# Altium PCB PCB1.PcbDoc
Units mil, origin at the board's own origin, x right, y up, seen from the top; angles counter-clockwise.
Board outline 1355 x 1300 mil, 2 copper layers (Top Layer, Bottom Layer); 3 components, 5 nets, 25 pads, 58 vias.
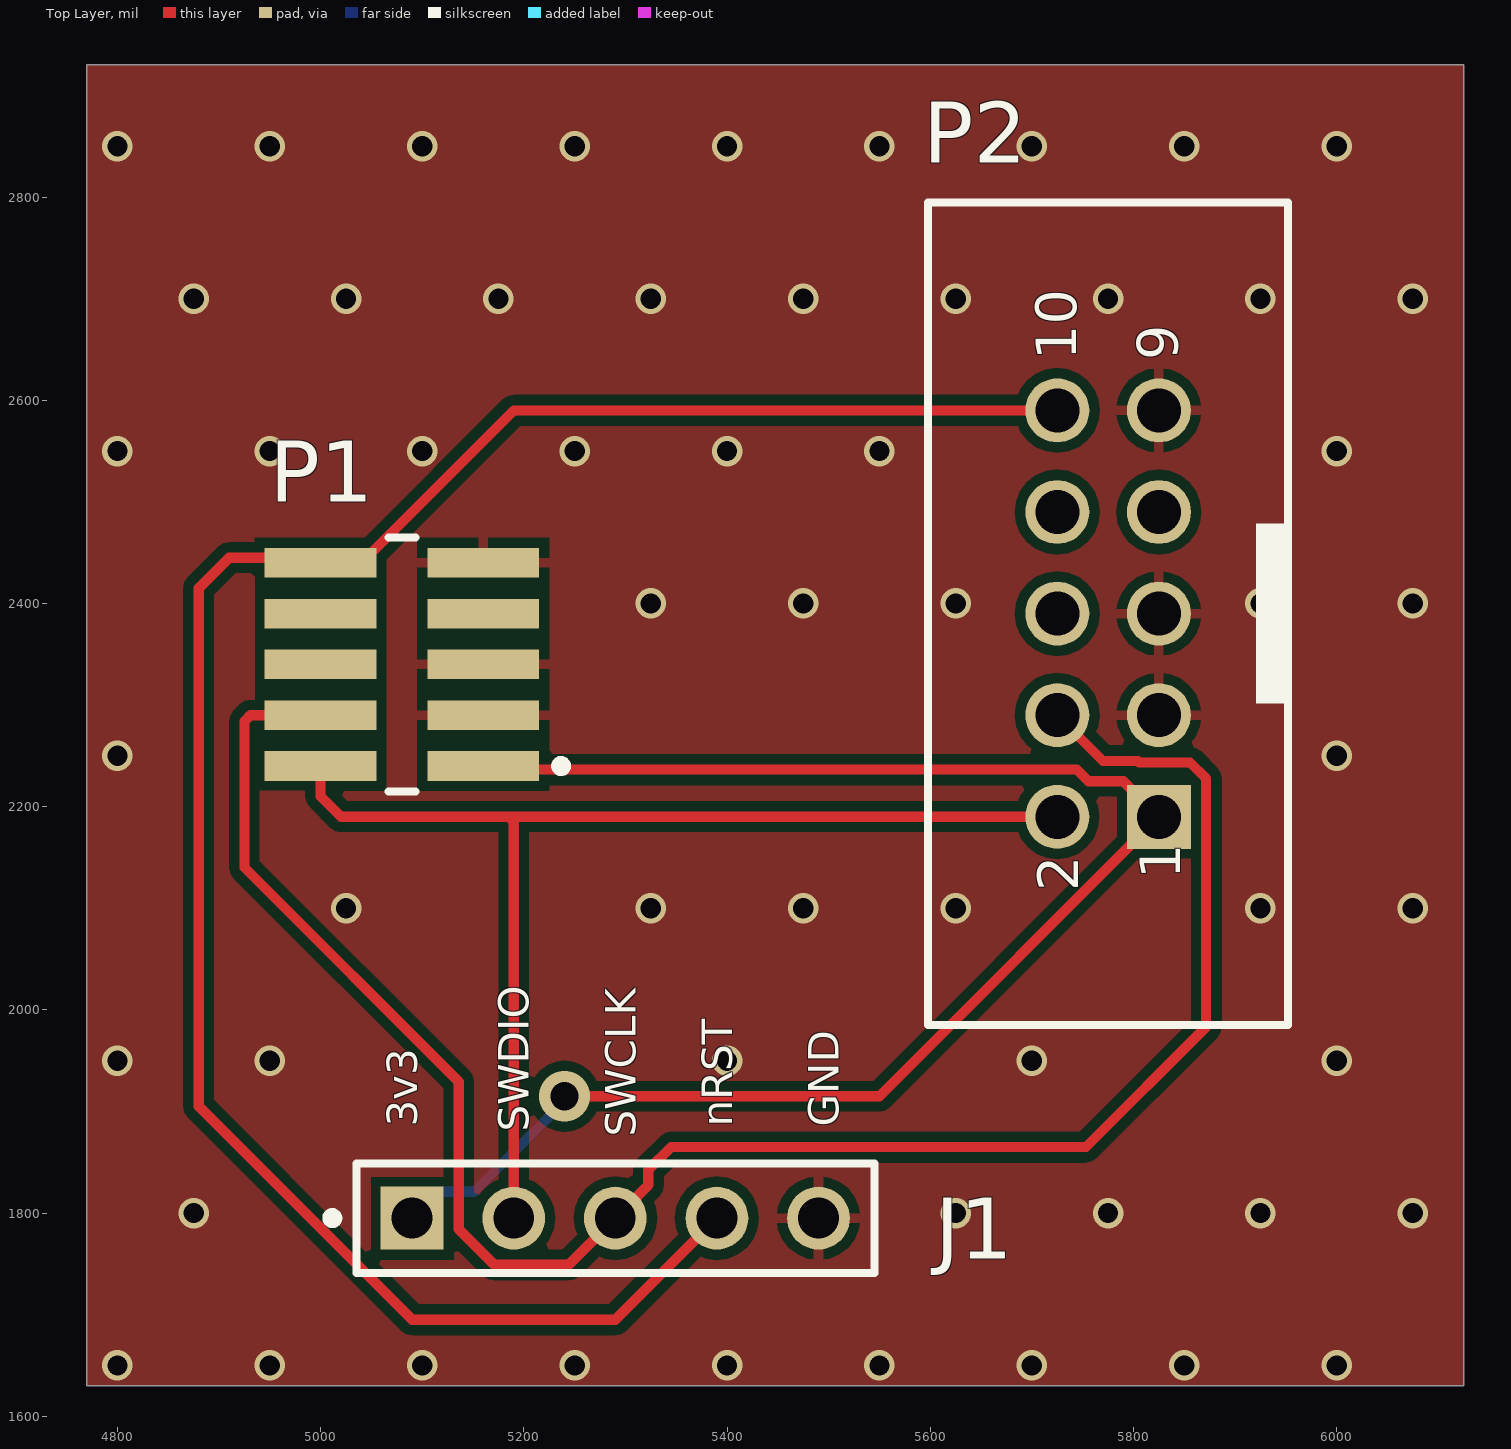
[diagram p0: Top Layer view]
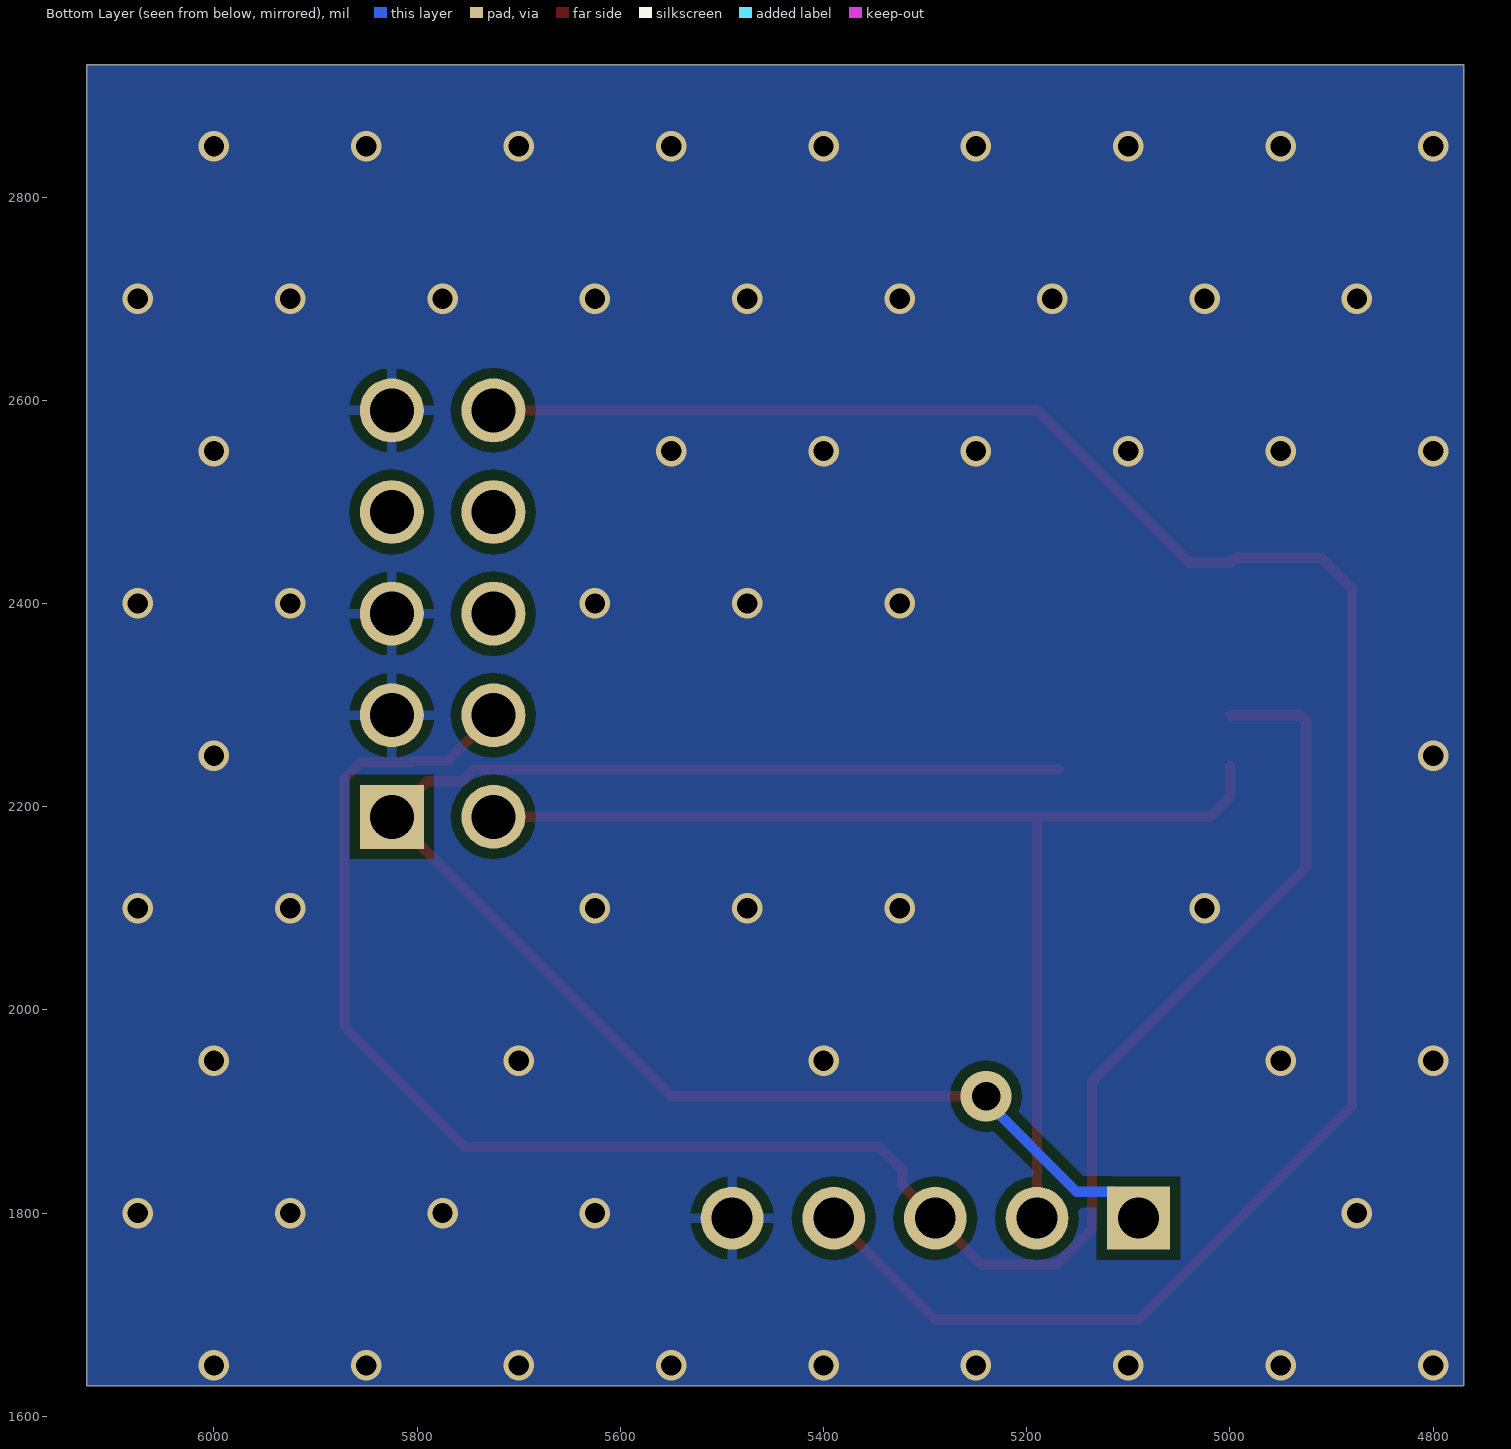
[diagram p1: Bottom Layer view, seen from below]
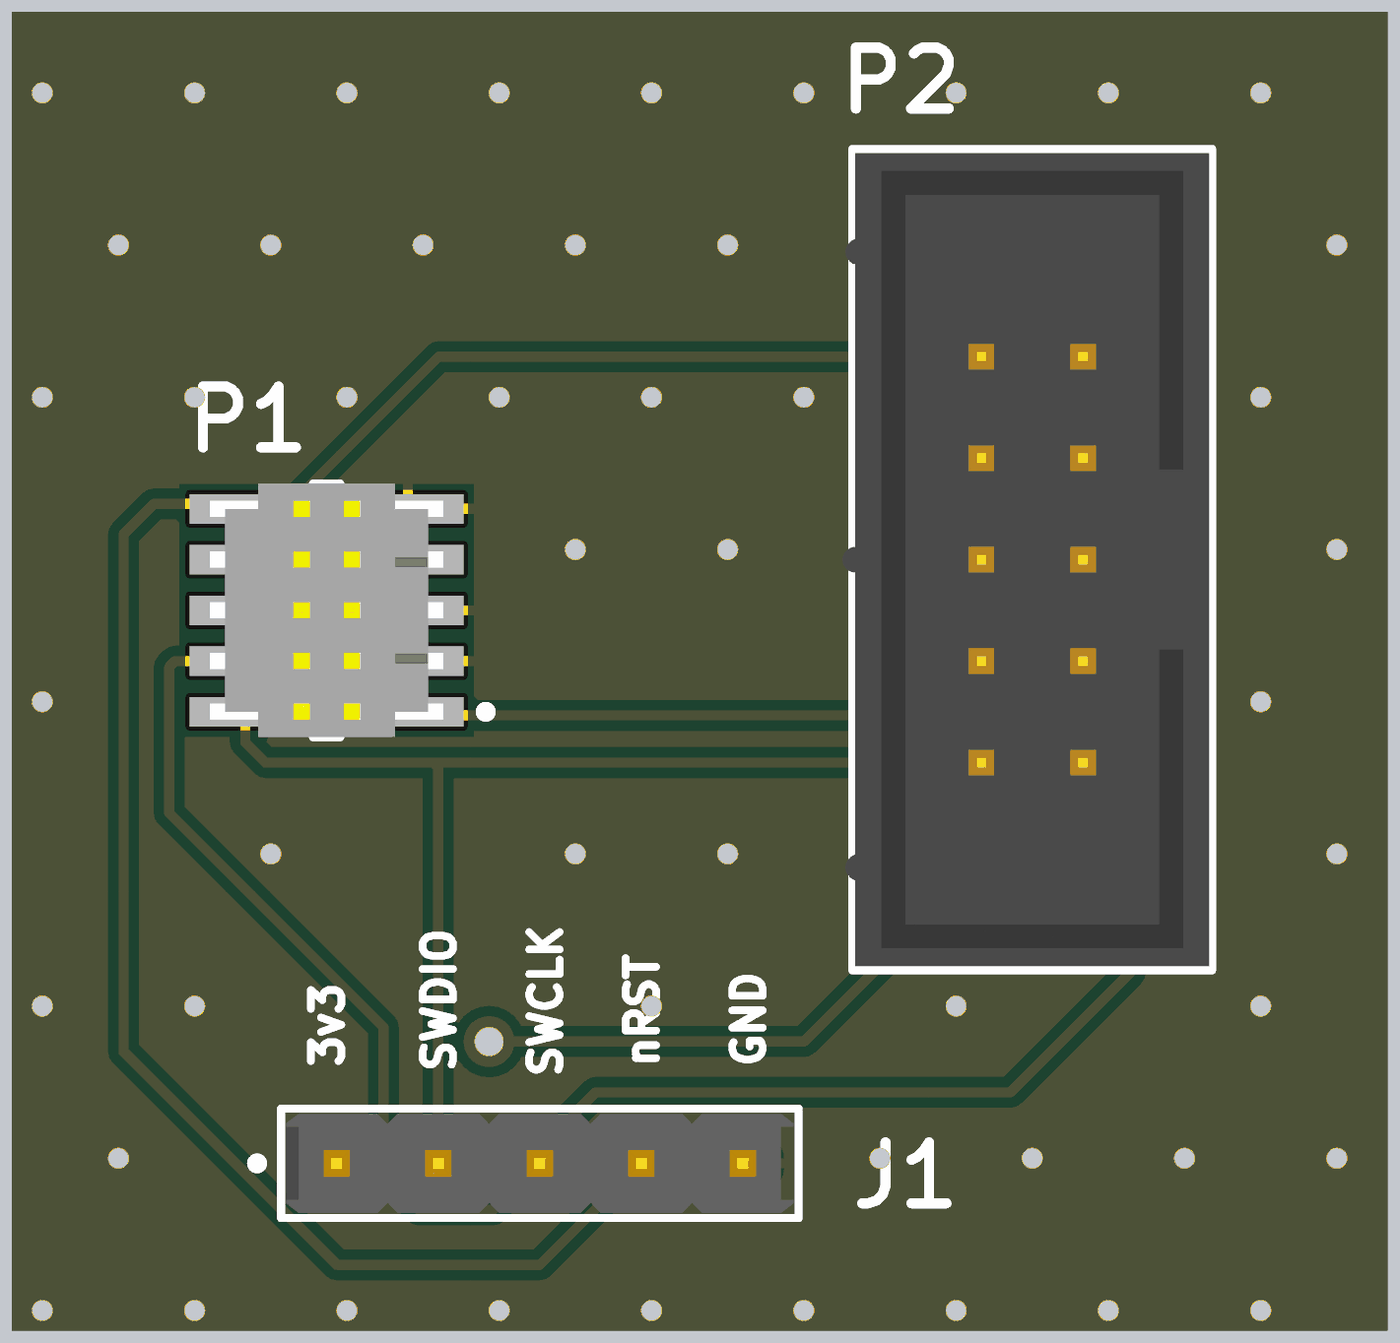
[diagram p2: 3D render of the assembled board from above, using the file's embedded part models]

## Layer stack, top to bottom
Top Solder: solder mask 0.4, Solder Resist, Dk 3.5
Top Layer: signal copper 1.4
Dielectric 1: dielectric 12.6, FR-4, Dk 4.8
Bottom Layer: signal copper 1.4
Bottom Solder: solder mask 0.4, Solder Resist, Dk 3.5

## Board outline
4770,1630 4770,2930 6125,2930 6125,1630

## Design rules (kind name [scope] priority, off if disabled: settings)
Clearance [All] p1: gap=10 ignorepadtopadclearanceinfootprint=FALSE except(0: Arc-Hole Track-Hole SMDPad-Hole THPad-Hole Via-Hole Fill-Hole Poly-Hole Region-Hole Text-Hole)
PlaneConnect [All] p1: pad.planeconnectstyle=Relief pad.reliefexpansion=20 pad.reliefentries=4 pad.reliefconductorwidth=10 pad.reliefairgap=10 via.planeconnectstyle=Direct via.reliefexpansion=20 via.reliefentries=4 via.reliefconductorwidth=10 via.reliefairgap=10
PolygonConnect [All] p1: thpad.connectstyle=Relief thpad.reliefconductorwidth=10 thpad.reliefentries=4 thpad.polygonreliefangle="90 Angle" thpad.airgapwidth=10 smdpad.connectstyle=Relief smdpad.reliefconductorwidth=10 smdpad.reliefentries=4 smdpad.polygonreliefangle="90 Angle" smdpad.airgapwidth=10 via.connectstyle=Direct via.reliefconductorwidth=10 via.reliefentries=4 via.polygonreliefangle="90 Angle" via.airgapwidth=10
RoutingVias [All] p1: holewidth=28 width=50 viastyle="Through Hole" minholewidth=28 minwidth=50 maxholewidth=28 maxwidth=50
SolderMaskExpansion SolderMaskExpansion_1 [IsVia] p1: expansion=4 istentingtop=TRUE
SolderMaskExpansion [All] p2: expansion=4 istentingtop=FALSE
Width [All] p1: maxlimit=10 minlimit=10 preferedwidth=10
29 further rules are at their usual default settings.

## Components (designator, comment, footprint, x,y, rotation, side; value= is the part's Value field where it differs from the comment)
J1 "22-28-4057" FP-22-28-4057-MFG 5290,1795 r0 top
P1 "FTSH-105-01-F-DV-K" SMTC-FTSH-105-01-L-DV-K_V 5080,2340 r90 top
P2 "61201021621" 61201021621 5775,2390 r90 top

## Footprints (in the part's own frame and the unit in brackets; to place one, negate y for a bottom-side part, rotate by r counter-clockwise, add the part's x,y. Pads: shape width x height; smd on the part's side, far side on the other; paste and mask are expansions set on the pad)
61201021621 [mm] "10 pins, straight, gold plating"
  rect 1.6x1.6 hole 1.1: 1(-5.08,-1.27)
  round 1.6 hole 1.1: 2(-5.08,1.27) 3(-2.54,-1.27) 4(-2.54,1.27) 5(0,-1.27) 6(0,1.27) 7(2.54,-1.27) 8(2.54,1.27) 9(5.08,-1.27) 10(5.08,1.27)
  silkscreen extent -10.28,-4.5 10.28,4.5, body extent -10.18,-4.42 10.18,4.75, height 9.13
FP-22-28-4057-MFG [mm]
  rect 1.57x1.57 hole 1.02 paste-1000 mask+0: 1(-5.08,0)
  round 1.57 hole 1.02 paste-1000 mask+0: 2(-2.54,0) 3(0,0) 4(2.54,0) 5(5.08,0)
  silkscreen extent -7.2,-1.37 6.48,1.37, body extent -6.58,-1.47 6.58,1.47, height 0.25
SMTC-FTSH-105-01-L-DV-K_V [mm] "CONN, 10-Leads, Body 6.35x3.43mm, Pitch 1.27mm"
  rect 0.74x2.79 smd: 1(-2.54,-2.035) 2(-2.54,2.035) 3(-1.27,-2.035) 4(-1.27,2.035) 5(0,-2.035) 6(0,2.035) 7(1.27,-2.035) 8(1.27,2.035) 9(2.54,-2.035) 10(2.54,2.035)
  silkscreen extent -3.17,-4.11 3.17,0.34, body extent -3.17,-2.92 3.18,2.92, height 6.12

## Part data
J1: library part CMP-04776-001007-1, "KK 100 HDR ASSY BKWY 05 CKT 30 S", Color=Black, Contact Resistance=20mR, Current Rating=4A, Max Operating Temperature=75°C, Max Voltage Rating (DC)=250.25kV, Min Operating Temperature=0°C, Package Quantity=1, Voltage Rating=250V, Connector Type="Male Pin", Contact Material=Brass, Contact Mating Length=0.32inch, Contact Plating=Gold, Contact Type="Male Pin", Gender=Male, Glow Wire Compliant=Non-compliant, Housing Color=Black, Housing Material=Thermoplastic, Lead Free="Lead Free", Mount="Through Hole", Number of Circuits=5, Number of Contacts=5, Number of Positions=5, Number of Rows=1, Orientation=Straight, Packaging=Bulk, Pitch=2.54mm, RoHS Compliant=Yes, Series=42375, Termination=Solder
P1: library part CMP-2000-05352-1, "Male Header, Pitch 1.27 mm, 2 x 5 Position, Height 6.12 mm, RoHS, Tube", Color=Black, Manufacturer=Samtec, Package Description="Male Header, Pitch 1.27 mm, 2 x 5 Position, Height 5.97 mm, Tail Length 4.32 mm", Package Reference=FTSH-105-01-L-DV-K, Category=Connectors,Interconnects, Connector Type=Header,Shrouded, Contact Finish=Gold, Contact Finish Thickness=3µin(0.08µm), Contact Mating Length="0.120\"(3.05mm)", Contact Type=MalePin, Datasheet URL=http://suddendocs.samtec.com/prints/ftsh-1xx-xx-xxx-dv-xxx-mkt.pdf, Datasheet Version="Rev. ET, 10/1995", Family=RectangularConnectors-Headers,MalePins, Fastening Type=-, Features=-, Manufacturer URL=http://www.samtec.com/, Mounting Type=SurfaceMount, Number of Positions=10, Number of Positions Loaded=All, Number of Rows=2, Package URL=http://suddendocs.samtec.com/prints/ftsh-1xx-xx-xxx-dv-xxx-footprint.pdf, Packaging=Tube, Pitch="0.050\"(1.27mm)", Row Spacing="0.050\"(1.27mm)", Series=FTSH, Termination=Solder
P2: library part CMP-1502-00007-1, "Male Box Header WR-BHD, THT, Vertical, pitch 2.54 mm, 10 pins", Contact Resistance=20mOhm, Manufacturer="Wurth Elektronik", Operating Temperature=-40to125degC, Withstanding Voltage=500VAC, Working Voltage=250VAC, Datasheet URL=https://katalog.we-online.de/em/datasheet/6120xx21621.pdf, Gender=Male, Manufacturer URL=http://www.we-online.de, Mounting Technology=THT, Orientation=Vertical, Package Reference=61201021621, Packaging=Tray, Part Number=61201021621, Pin Number=10, Pitch=2.54mm, Published Date=August2018, Publisher=WurthElektronik

## Via types
v1: diameter 30, hole 20, Top Layer to Bottom Layer, tented both sides, 57 vias
v2: diameter 50, hole 28, Top Layer to Bottom Layer, tented both sides, 1 vias

## Nets (pads, with @x,y where several pads share a name; then routed paths per layer and width w, separated by ;. In a path a pad name is that pad's centre, name@x,y a point inside that pad or via, vN(x,y) a via of type N, cw(c..) or ccw(c..) an arc to the next point about the centre after c; other vN are vias at no path point)
3v3: J1.1 P1.1 P2.1 | length 1597.3
  Top Layer w10: J1.1 5090,1785 J1.1@5100,1785 ; P1.1@5168.5,2236.5 5744.26,2236.5 5755.76,2225 5790,2225 P2.1 5550,1915 v2(5240,1915)
  Bottom Layer w10: J1.1 5115.91,1820.91 5150.99,1820.91 5240,1909.92 v2(5240,1915)
GND: J1.5 P1.3 P1.5 P1.9 P2.3 P2.5 P2.9
  other v1: 4800,1650 4950,1650 5100,1650 5250,1650 5400,1650 5550,1650 5700,1650 5850,1650 6000,1650 4875,1800 5625,1800 5775,1800 5925,1800 6075,1800 4800,1950 4950,1950 5400,1950 5700,1950 6000,1950 5025,2100 5325,2100 5475,2100 5625,2100 5925,2100 6075,2100 4800,2250 6000,2250 5325,2400 5475,2400 5625,2400 5925,2400 6075,2400 4800,2550 4950,2550 5100,2550 5250,2550 5400,2550 5550,2550 6000,2550 4875,2700 5025,2700 5175,2700 5325,2700 5475,2700 5625,2700 5775,2700 5925,2700 6075,2700 4800,2850 4950,2850 5100,2850 5250,2850 5400,2850 5550,2850 5700,2850 5850,2850 6000,2850
nRST: J1.4 P1.10 P2.10 | length 2070
  Top Layer w10: J1.4 5290,1695 5090,1695 4880,1905 4880,2415 4910,2445 4994.88,2445 P1.10 5040.24,2440 5190.24,2590 P2.10
SWCLK: J1.3 P1.4 P2.4 | length 1937.3
  Top Layer w10: P1.4 4930.86,2290 4925,2284.14 4925,2140.04 5135.91,1929.13 5135.91,1784.17 5170.99,1749.09 5244.09,1749.09 J1.3 5322.46,1827.46 5322.46,1842.46 5345,1865 5753.28,1865 5871.5,1983.21 5871.5,2227.71 5855.7,2243.5 5805.74,2243.5 5804.24,2245 5770,2245 P2.4
SWDIO: J1.2 P1.2 P2.2 | length 1160.4
  Top Layer w10: P1.2 4999.88,2210.12 5020,2190 5185,2190 ; J1.2 5190,2185 5185,2190 ; P2.2 5185,2190
pads on no net: P1.6 P1.7 P1.8 P2.6 P2.7 P2.8

## Polygon pours and split planes (outlines as drawn)
GND on Top Layer "GND_L01_P000" (solid, pour order 0): 4770,1630 4770,2930 6125,2930 6125,1630
GND on Bottom Layer "GND_L02_P001" (solid, pour order 1): 4770,1630 4770,2930 6125,2930 6125,1630

## Silkscreen, mask and mechanical layers (free items; w line width, h text height)
Top Overlay:
  text "3v3" at 5095,1885 h30 r90
  text "nRST" at 5405,1885 h30 r90
  text "GND" at 5510,1885 h30 r90
  text "SWDIO" at 5205,1880 h30 r90
  text "SWCLK" at 5310,1875 h30 r90
Mechanical 1:
  the board outline again, w10

## Text inside footprints (layer, text, board x,y; h text height)
P2: Top Overlay "9" at 5843.5,2639.61 h40 r90; Top Overlay "10" at 5743.5,2639.61 h40 r90; Top Overlay "2" at 5745.87,2116.77 h40 r90; Top Overlay "1" at 5845.87,2128.58 h40 r90